# Altium PCB My_PCB.PcbDoc (part 1 of 2)
Units mil, origin at the board's own origin, x right, y up, seen from the top; angles counter-clockwise.
Board outline 5800 x 4400 mil, 2 copper layers (Top Layer, Bottom Layer); 133 components, 156 nets, 707 pads, 234 vias.
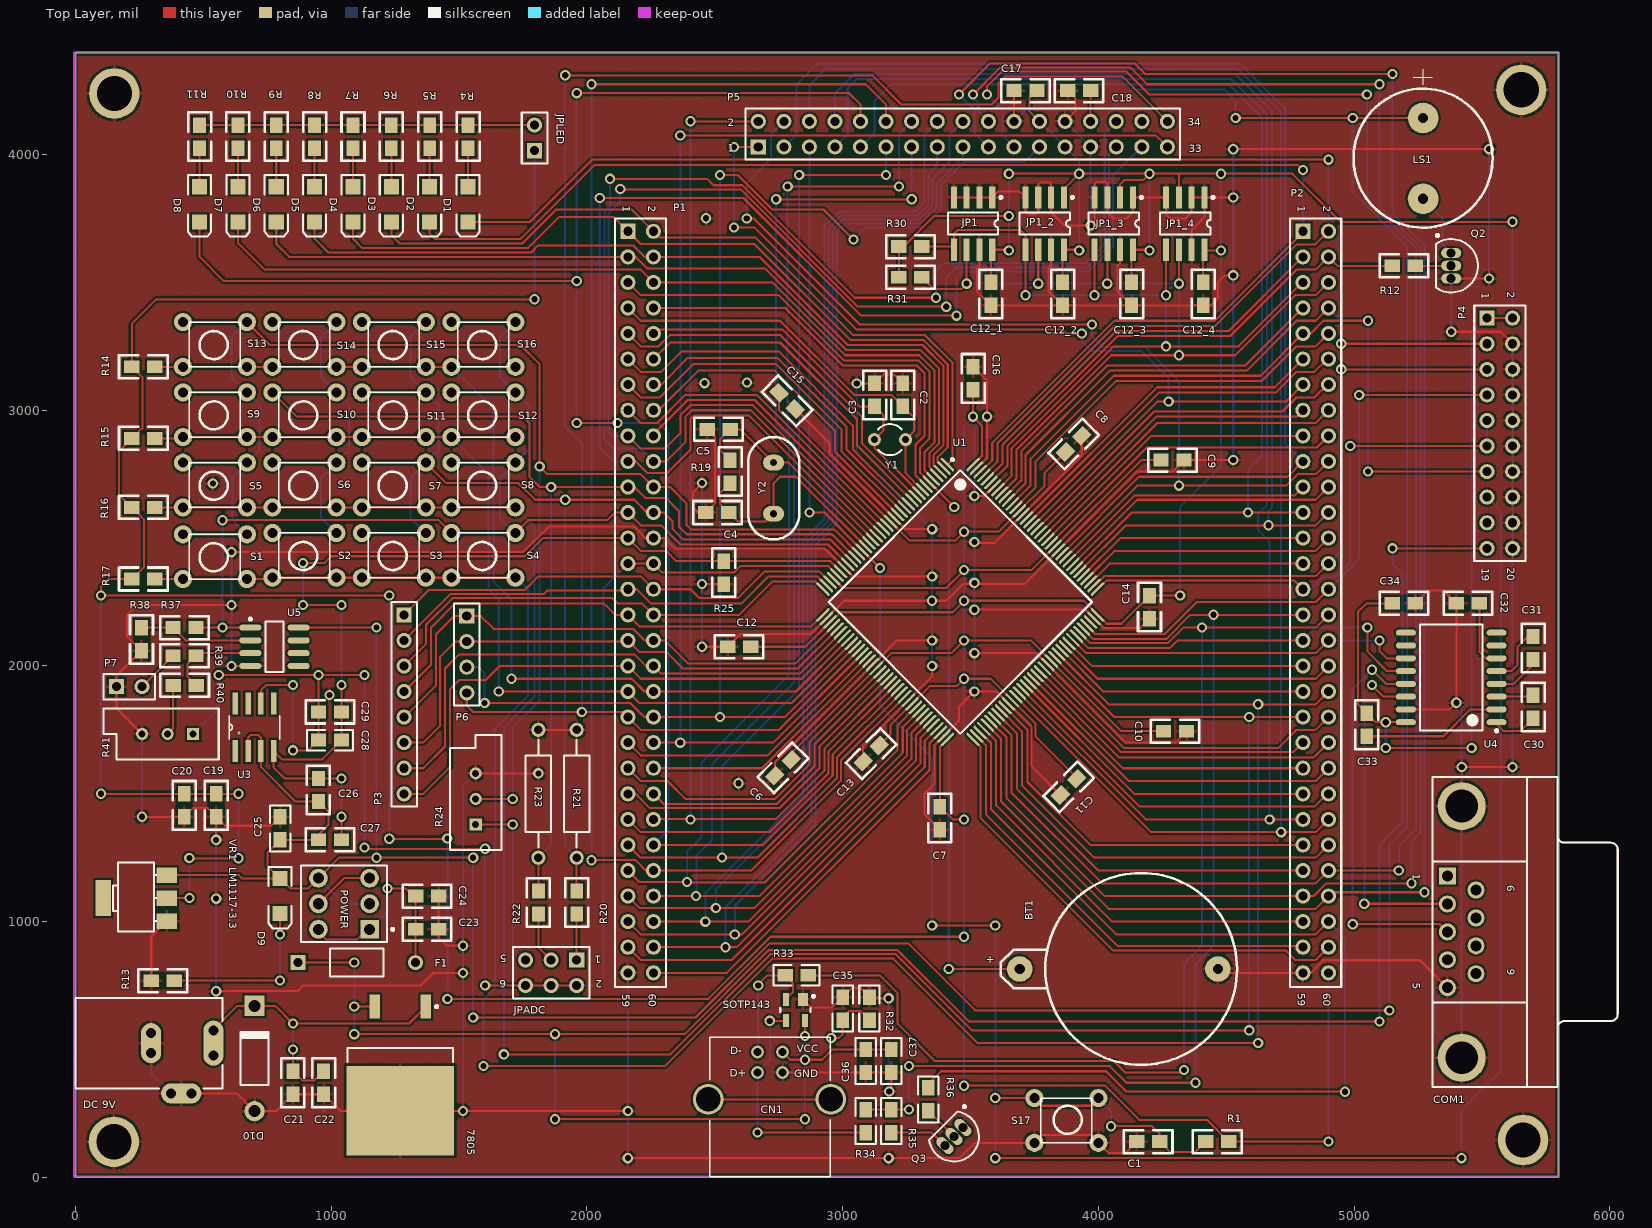
[diagram p0: Top Layer view]
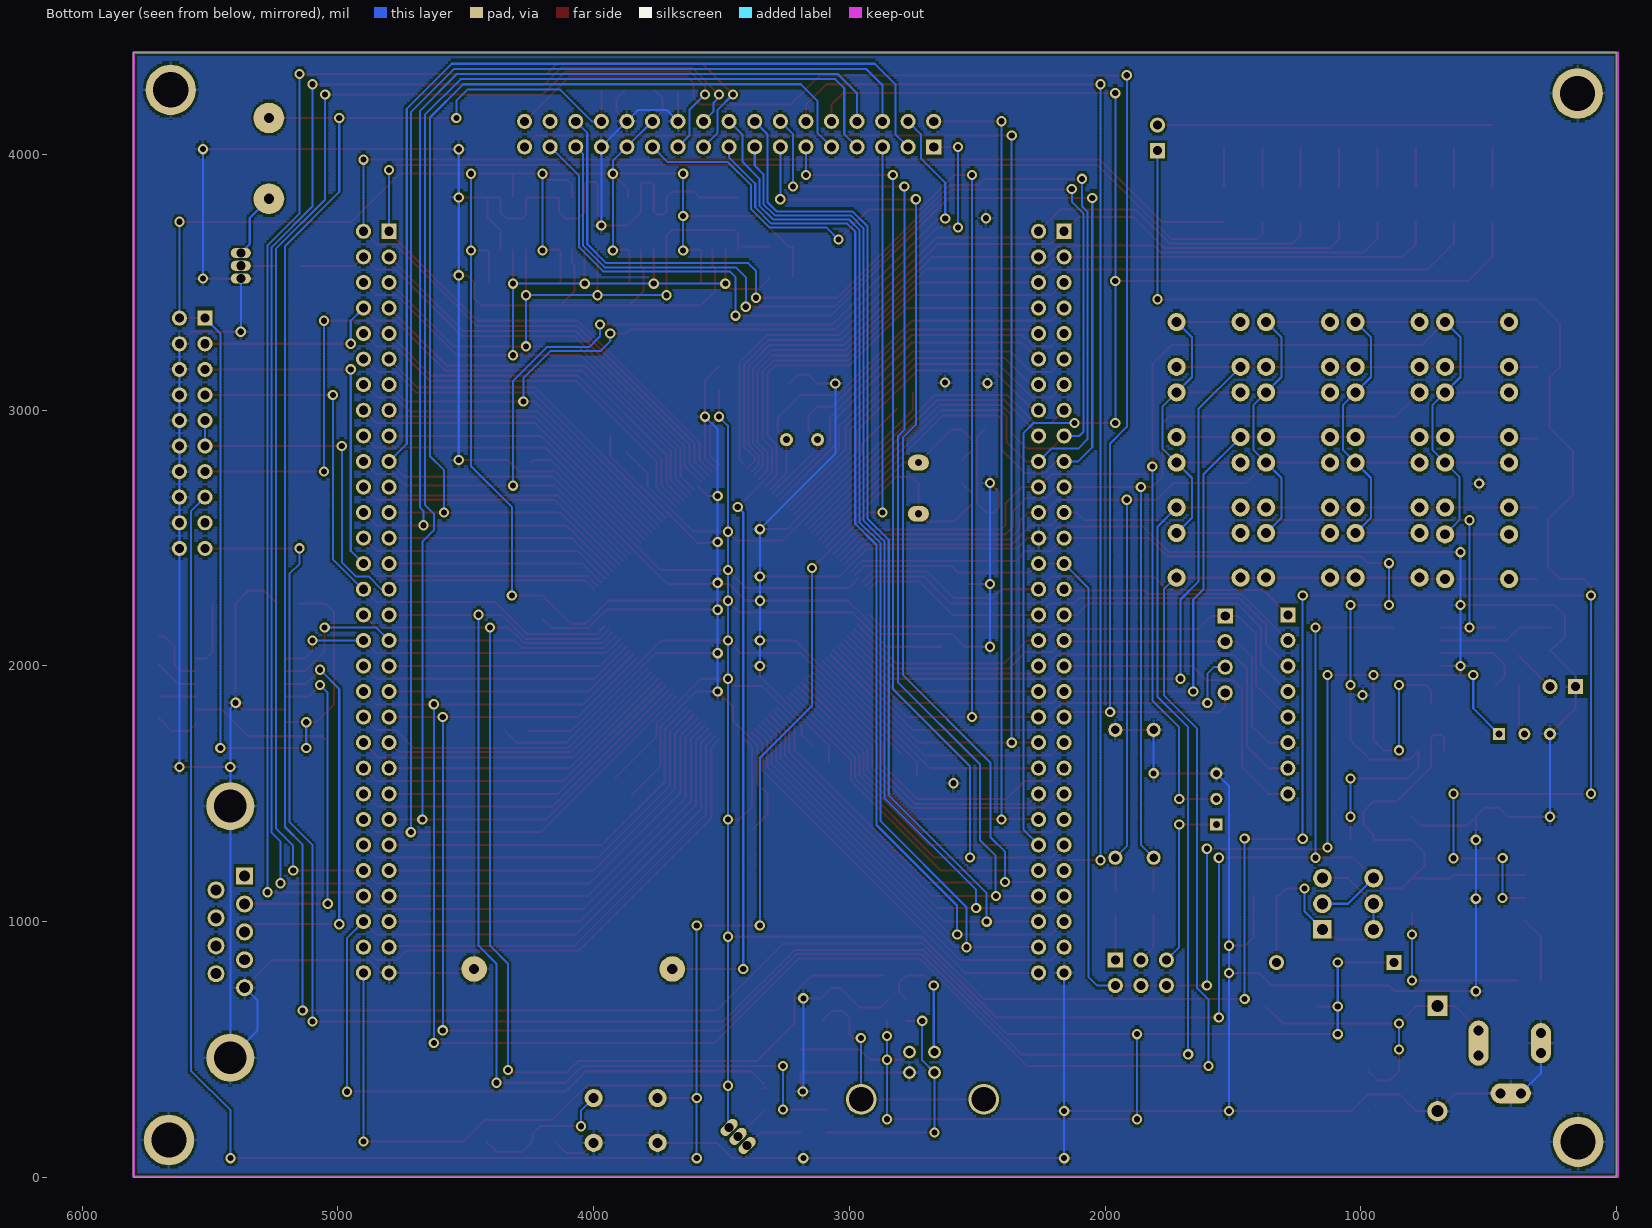
[diagram p1: Bottom Layer view, seen from below]

## Layer stack, top to bottom
Top Layer: signal copper 1.4
Dielectric: dielectric 12.6, FR-4, Dk 4.8
Bottom Layer: signal copper 1.4

## Board outline
0,4400 0,0 5800,0 5800,4400

## Design rules (kind name [scope] priority, off if disabled: settings)
AssemblyTestPointUsage [All] p1 off:
AssemblyTestpoint [All] p1 off: testpointundercomponent=TRUE minsize=40 maxsize=100 preferedsize=60 minholesize=0 maxholesize=40 preferedholesize=32 testpointgrid=1 usegrid=TRUE gridtolerance=0.01 allowsidetop=TRUE allowsidebottom=TRUE
Clearance [All] p1: gap=8
DiffPairsRouting [All] p1 off: maxlimit=10 minlimit=10 mostfreqgap=10 maxuncoupledlength=500
FabricationTestPointUsage [All] p1 off: valid=0 allowmultiple=FALSE
FabricationTestpoint [All] p1 off: side=3 testpointundercomponent=TRUE minsize=40 maxsize=100 preferedsize=60 minholesize=0 maxholesize=40 preferedholesize=32 testpointgrid=1 allowsidetop=TRUE allowsidebottom=TRUE usegrid=TRUE gridtolerance=0.01
FanoutControl Fanout_BGA [IsBGA] p1 off: bgadir=Out bgaviamode=Centered fanoutstyle=Auto fanoutdirection=Alternating viagrid=1 // Fanout_BGA (Default Rule)
FanoutControl Fanout_LCC [IsLCC] p2 off: bgadir=Out bgaviamode=Centered fanoutstyle=Auto fanoutdirection=Alternating viagrid=1 // Fanout_LCC (Default Rule)
FanoutControl Fanout_SOIC [IsSOIC] p3 off: bgadir=Out bgaviamode=Centered fanoutstyle=Auto fanoutdirection=Alternating viagrid=1 // Fanout_SOIC (Default Rule)
FanoutControl Fanout_Small [(CompPinCount < 5)] p4 off: bgadir=Out bgaviamode=Centered fanoutstyle=Auto fanoutdirection=OutThenIn viagrid=1 // Fanout_Small (Default Rule)
FanoutControl Fanout_Default [All] p5 off: bgadir=Out bgaviamode=Centered fanoutstyle=Auto fanoutdirection=Alternating viagrid=1 // Fanout_Default (Default Rule)
Height [All] p1 off: minheight=0 maxheight=1000 prefheight=500
HoleSize [All] p1: absolutevalues=TRUE maxlimit=500 minlimit=1 maxpercent=80.000 minpercent=20.000
MinimumSolderMaskSliver [All] p1 off: minsoldermaskwidth=10
NetAntennae [All] p1 off: netantennaetolerance=0
PolygonConnect [All] p1: connectstyle=Relief reliefconductorwidth=10 reliefentries=4 polygonreliefangle="90 Angle" airgapwidth=10
RoutingCorners [All] p1 off: cornerstyle=45-Degree minsetback=100 maxsetback=100
RoutingLayers [All] p1 off: top layer_v5=TRUE bottom layer_v5=TRUE
RoutingPriority [All] p1 off: routingpriority=0
RoutingVias [All] p1: holewidth=23.62 width=39.37 viastyle="Through Hole" minholewidth=14 minwidth=28 maxholewidth=280 maxwidth=500
SilkToSolderMaskClearance [IsPad] p1 off: minsilkscreentomaskgap=8 clearancetoexposedcopper=TRUE
SolderMaskExpansion [All] p1: expansion=4
Width [All] p1: maxlimit=100 minlimit=8 preferedwidth=8
10 further rules are at their usual default settings.

## Components (designator, comment, footprint, x,y, rotation, side; value= is the part's Value field where it differs from the comment)
7805 "Volt Reg" D2PAK_N 1270,400 r270 top
BT1 "3V" BATTERY 4080,815 r0 top
C1 "Cap Semi" 0805 4150,140 r0 top
C2 "Cap Semi" 0805 3235,3105 r270 top
C3 "Cap Semi" 0805 3125,3105 r270 top
C4 "Cap Semi" 0805 2465,2600 r0 top
C5 "Cap Semi" 0805 2470,2925 r0 top
C6 "Cap Semi" 0805 2735,1570 r45 top
C7 "Cap Semi" 0805 3380,1360 r90 top
C8 "Cap Semi" 0805 3935,2900 r225 top
C9 "Cap Semi" 0805 4335,2805 r180 top
C10 "Cap Semi" 0805 4345,1745 r180 top
C11 "Cap Semi" 0805 3852,1495 r45 top
C12 "Cap Semi" 0805 2550,2075 r0 top
C12_1 "104" 0805 3580,3500 r270 top
C12_2 "104" 0805 3860,3500 r270 top
C12_3 "104" 0805 4130,3500 r270 top
C12_4 "104" 0805 4410,3500 r270 top
C13 "Cap Semi" 0805 3080,1625 r45 top
C14 "Cap Semi" 0805 4200,2185 r90 top
C15 "Cap Semi" 0805 2815,3005 r135 top
C16 "Cap Semi" 0805 3510,3170 r270 top
C17 "Cap Semi" 0805 3760,4250 r180 top
C18 "Cap Semi" 0805 3880,4250 r0 top
C19 "Cap Pol3" 0805 550,1500 r270 top
C20 "Cap Semi" 0805 425,1410 r90 top
C21 "Cap Semi" 0805 850,325 r90 top
C22 "Cap Pol3" 0805 970,415 r270 top
C23 "Cap Semi" 0805 1420,970 r180 top
C24 "Cap Pol3" 0805 1330,1100 r0 top
C25 "Cap Semi" 0805 800,1410 r270 top
C26 "Cap Semi" 0805 950,1560 r270 top
C27 "Cap Semi" 0805 1040,1320 r180 top
C28 "Cap Semi" 0805 1040,1710 r180 top
C29 "Cap Pol3" 0805 950,1820 r0 top
C30 "Cap Pol3" 0805 5700,1795 r90 top
C31 "Cap Pol3" 0805 5700,2025 r90 top
C32 "Cap Pol3" 0805 5400,2245 r0 top
C33 "Cap Pol3" 0805 5050,1725 r90 top
C34 "Cap Pol3" 0805 5150,2245 r0 top
C35 "Cap" 0805 3000,705 r270 top
C36 "Cap" 0805 3090,410 r90 top
C37 "Cap Pol1" 0805 3190,500 r270 top
CN1 "USB-typeB" USB-B 2765,490 r0 top
COM1 "D Connector 9" DSUB1.385-2H9 5795,960 r270 top
D1 "LED2" 3.2X1.6X1.1 1535,3805 r270 top
D2 "LED2" 3.2X1.6X1.1 1385,3805 r270 top
D3 "LED2" 3.2X1.6X1.1 1235,3805 r270 top
D4 "LED2" 3.2X1.6X1.1 1085,3805 r270 top
D5 "LED2" 3.2X1.6X1.1 935,3805 r270 top
D6 "LED2" 3.2X1.6X1.1 785,3805 r270 top
D7 "LED2" 3.2X1.6X1.1 635,3805 r270 top
D8 "LED2" 3.2X1.6X1.1 485,3805 r270 top
D9 "PLED" 3.2X1.6X1.1 800,1100 r270 top
D10 "4007" DO-41 700,465 r90 top
"DC 9V" "PWR2.5" KLD-0202 0,525 r0 top
F1 "500MA" PIN-W2/E2.8 1100,840 r0 top
JP1 "ST24C02" SO8 3510,3730 r180 top
JP1_2 "ST24C02" SO8 3790,3730 r180 top
JP1_3 "ST24C02" SO8 4060,3730 r180 top
JP1_4 "ST24C02" SO8 4340,3730 r180 top
JPADC "ADC接口" HDR2X3 1960,850 r180 top
JPLED "Header 2" HDR1X2 1795,4015 r90 top
LS1 "Bell" BELL 5270,3985 r90 top
P1 "CON30X2" HDR2X30 2160,3700 r270 top
P2 "CON30X2" HDR2X30 4800,3700 r270 top
P3 "ADC_IN" HDR1X8 1285,2200 r270 top
P4 "JTAG" HDR2X10 5520,3360 r270 top
P5 "LCD" HDR2X17 2670,4030 r0 top
P6 "DAC_PWM" HDR1X4 1530,2195 r270 top
P7 "Header 2" HDR1X2 160,1919 r0 top
POWER "SW DPDT" DPDT-6 1050,1070 r180 top
Q2 "8050" TO-226-AA 5380,3565 r180 top
Q3 "8550" TO-92A 3435,160 r135 top
R1 "Res3" 0805 4420,140 r0 top
R4 "Res3" 0805 1535,4115 r270 top
R5 "Res3" 0805 1385,4115 r270 top
R6 "Res3" 0805 1235,4115 r270 top
R7 "Res3" 0805 1085,4115 r270 top
R8 "Res3" 0805 935,4115 r270 top
R9 "Res3" 0805 785,4115 r270 top
R10 "Res3" 0805 635,4115 r270 top
R11 "Res3" 0805 485,4115 r270 top
R12 "Res3" 0805 5150,3565 r0 top
R13 "Res3" 0805 296,769 r0 top
R14 "Res3" 0805 220,3170 r0 top
R15 "Res3" 0805 220,2890 r0 top
R16 "Res3" 0805 220,2620 r0 top
R17 "Res3" 0805 220,2340 r0 top
R19 "Res3" 0805 2560,2715 r90 top
R20 "Res3" 0805 1960,1120 r270 top
R21 "热敏电阻" AXIAL-0.5 1960,1500 r270 top
R22 "Res3" 0805 1810,1120 r270 top
R23 "光敏电阻" AXIAL-0.5 1810,1500 r270 top
R24 "滑动变阻器" VR5 1565,1480 r90 top
R25 "Res3" 0805 2535,2320 r90 top
R30 "10K" 0805 3220,3640 r0 top
R31 "10K" 0805 3220,3520 r0 top
R32 "Res3" 0805 3105,705 r270 top
R33 "Res3" 0805 2775,790 r0 top
R34 "Res3" 0805 3090,175 r90 top
R35 "Res3" 0805 3190,175 r90 top
R36 "Res3" 0805 3335,260 r90 top
R37 "Res2" 0805 381,2150 r0 top
R38 "Res2" 0805 258,2059 r90 top
R39 "Res2" 0805 381,2040 r0 top
R40 "Res2" 0805 382,1924 r0 top
R41 "Res Tap" VR5 360,1734 r180 top
S1 "0" KEYSB1 670,2340 r90 top
S2 "ENTER" KEYSB1 1020,2345 r90 top
S3 "." KEYSB1 1370,2345 r90 top
S4 "+" KEYSB1 1720,2345 r90 top
S5 "1" KEYSB1 670,2620 r90 top
S6 "2" KEYSB1 1020,2620 r90 top
S7 "3" KEYSB1 1370,2620 r90 top
S8 "-" KEYSB1 1720,2620 r90 top
S9 "4" KEYSB1 670,2895 r90 top
S10 "5" KEYSB1 1020,2895 r90 top
S11 "6" KEYSB1 1370,2895 r90 top
S12 "*" KEYSB1 1720,2895 r90 top
S13 "7" KEYSB1 670,3170 r90 top
S14 "8" KEYSB1 1020,3170 r90 top
S15 "9" KEYSB1 1370,3170 r90 top
S16 "/" KEYSB1 1720,3170 r90 top
S17 "RESET" KEYSB1 3750,310 r270 top
SOTP143 "PRTR5V0U2X" SOT-143_N 2815,655 r270 top
U1 "STM32F103ZET6" LQFP144_N 3460,2250 r315 top
U3 "REF196GSZ-REEL" R_8 700,1760 r90 top
U4 "MAX232AEWE" WSO16_L 5380,1955 r180 top
U5 "LM358AM" M08A_N 778,2075 r0 top
"VR1  LM1117-3.3" "Volt Reg" LM1117 356,1002 r90 top
Y1 "32.768K" R38 3185,2885 r270 top
Y2 "8MHz" XTAL 2730,2695 r90 top

## Footprints (in the part's own frame and the unit in brackets; to place one, negate y for a bottom-side part, rotate by r counter-clockwise, add the part's x,y. Pads: shape width x height; smd on the part's side, far side on the other; paste and mask are expansions set on the pad)
3.2X1.6X1.1 [mm] "SMT LED; 2 Flat Leads"
  rect 1.5x1.5 smd: 1(-1.75,0) 2(1.75,0)
  silkscreen extent -2.9,-1.15 3.2,1.15
0805 [mil]
  rect 60x50 smd: 1(0,0) 2(90,0)
  silkscreen extent -50,-45 140,45
AXIAL-0.5 [mm] "Axial Device, Thru-Hole; 2 Leads; 0.5 in Pin Spacing"
  round 1.4 hole 0.85: 1(-6.35,0) 2(6.35,0)
  silkscreen extent -5.33,-1.27 5.33,1.27
BATTERY [mil]
  round 100 hole 40: 1(-387.5,0) 2(387.5,0)
  silkscreen extent -462,-375 462,375
BELL [mil]
  round 120 hole 40: 1(158,0) 2(-158,0)
  silkscreen extent -271,-272 348,272
D2PAK_N [mm] "D2-PAK, 4-Leads, Body 8.8x10.4mm, Pitch 2.54mm, Lead Span 15.1mm, IPC Medium Density"
  rect 2.4x1.05 smd: 1(-6.8,2.54) 3(-6.8,-2.54)
  rect 8.9x10.65 smd: 2(3.55,0)
  silkscreen extent -6.92,-5.25 -1.3,5.25, body extent -2.7,-5.28 6.3,5.28, height 4.69
DO-41 [mm] "Diode, Axial; Body 5.2 x 2.7 mm (LxDia. max), Lead Dia. 0.86 mm (max)"
  round 2 hole 1.2: 1(-5.23,0)
  rect 2x2 hole 1.2: 2(5.23,0)
  silkscreen extent -2.65,-1.4 2.75,1.4
DPDT-6 [mm] "Switch; 6 Leads"
  rect 1.85x1.85 hole 1.1: 1(-2.54,2.54)
  round 1.85 hole 1.1: 2(-2.54,0) 3(-2.54,-2.54) 4(2.54,-2.54) 5(2.54,0) 6(2.54,2.54)
  silkscreen extent -4.96,-3.81 4.28,3.81
DSUB1.385-2H9 [mm] "Connector; D Subminiature; 9 Position; Right Angle; Pitch 1.385 mm"
  rect 1.69x1.69 hole 1.09: 1(-5.54,-10.92)
  round 1.69 hole 1.09: 2(-2.77,-10.92) 3(0,-10.92) 4(2.77,-10.92) 5(5.54,-10.92) 6(-4.155,-8.08) 7(-1.385,-8.08) 8(1.385,-8.08) 9(4.155,-8.08)
  round 4.76 hole 3.26: 10(-12.495,-9.5) 11(12.495,-9.5)
  silkscreen extent -15.4,-12.4 15.4,6
HDR1X2 [mm] "Connector; Header; 2 Position"
  rect 1.5x1.5 hole 0.9: 1(0,0)
  round 1.5 hole 0.9: 2(2.54,0)
  silkscreen extent -1.27,-1.27 3.81,1.27
HDR1X4 [mm] "Connector; Header; 4 Position"
  rect 1.5x1.5 hole 0.9: 1(0,0)
  round 1.5 hole 0.9: 2(2.54,0) 3(5.08,0) 4(7.62,0)
  silkscreen extent -1.27,-1.27 8.89,1.27
HDR1X8 [mm] "Connector; Header; 8 Position"
  rect 1.5x1.5 hole 0.9: 1(0,0)
  round 1.5 hole 0.9: 2(2.54,0) 3(5.08,0) 4(7.62,0) 5(10.16,0) 6(12.7,0) 7(15.24,0) 8(17.78,0)
  silkscreen extent -1.27,-1.27 19.05,1.27
HDR2X3 [mm] "Connector; Header; 3x2 Position"
  rect 1.5x1.5 hole 0.9: 1(0,0)
  round 1.5 hole 0.9: 2(0,2.54) 3(2.54,0) 4(2.54,2.54) 5(5.08,0) 6(5.08,2.54)
  silkscreen extent -1.27,-1.27 6.35,3.81
HDR2X10 [mm] "Connector; Header; 10x2 Position"
  rect 1.5x1.5 hole 0.9: 1(0,0)
  round 1.5 hole 0.9: 2(0,2.54) 3(2.54,0) 4(2.54,2.54) 5(5.08,0) 6(5.08,2.54) 7(7.62,0) 8(7.62,2.54) 9(10.16,0) 10(10.16,2.54) 11(12.7,0) 12(12.7,2.54) 13(15.24,0) 14(15.24,2.54) 15(17.78,0) 16(17.78,2.54) 17(20.32,0) 18(20.32,2.54) 19(22.86,0) 20(22.86,2.54)
  silkscreen extent -1.27,-1.27 24.13,3.81
HDR2X17 [mm] "Connector; Header; 17x2 Position"
  rect 1.5x1.5 hole 0.9: 1(0,0)
  round 1.5 hole 0.9: 2(0,2.54) 3(2.54,0) 4(2.54,2.54) 5(5.08,0) 6(5.08,2.54) 7(7.62,0) 8(7.62,2.54) 9(10.16,0) 10(10.16,2.54) 11(12.7,0) 12(12.7,2.54) 13(15.24,0) 14(15.24,2.54) 15(17.78,0) 16(17.78,2.54) 17(20.32,0) 18(20.32,2.54) 19(22.86,0) 20(22.86,2.54) 21(25.4,0) 22(25.4,2.54) 23(27.94,0) 24(27.94,2.54) 25(30.48,0) 26(30.48,2.54) 27(33.02,0) 28(33.02,2.54) 29(35.56,0) 30(35.56,2.54) 31(38.1,0) 32(38.1,2.54) 33(40.64,0) 34(40.64,2.54)
  silkscreen extent -1.27,-1.27 41.91,3.81
HDR2X30 [mm] "Connector; Header; 30x2 Position"
  rect 1.5x1.5 hole 0.9: 1(0,0)
  round 1.5 hole 0.9: 2(0,2.54) 3(2.54,0) 4(2.54,2.54) 5(5.08,0) 6(5.08,2.54) 7(7.62,0) 8(7.62,2.54) 9(10.16,0) 10(10.16,2.54) 11(12.7,0) 12(12.7,2.54) 13(15.24,0) 14(15.24,2.54) 15(17.78,0) 16(17.78,2.54) 17(20.32,0) 18(20.32,2.54) 19(22.86,0) 20(22.86,2.54) 21(25.4,0) 22(25.4,2.54) 23(27.94,0) 24(27.94,2.54) 25(30.48,0) 26(30.48,2.54) 27(33.02,0) 28(33.02,2.54) 29(35.56,0) 30(35.56,2.54) 31(38.1,0) 32(38.1,2.54) 33(40.64,0) 34(40.64,2.54) 35(43.18,0) 36(43.18,2.54) 37(45.72,0) 38(45.72,2.54) 39(48.26,0) 40(48.26,2.54) 41(50.8,0) 42(50.8,2.54) 43(53.34,0) 44(53.34,2.54) 45(55.88,0) 46(55.88,2.54) 47(58.42,0) 48(58.42,2.54) 49(60.96,0) 50(60.96,2.54) 51(63.5,0) 52(63.5,2.54) 53(66.04,0) 54(66.04,2.54) 55(68.58,0) 56(68.58,2.54) 57(71.12,0) 58(71.12,2.54) 59(73.66,0) 60(73.66,2.54)
  silkscreen extent -1.27,-1.27 75.06,3.81
KEYSB1 [mil]
  round 71 hole 39: 1(0,250) 1(0,0) 2(175,250) 2(175,0)
  silkscreen extent 0,25 175,225
KLD-0202 [mm] "DC Power Jack, 2.5mm, KLD Series, PCB Mount"
  oval 2x4.5 all layers, no hole: 1(13.7,0)
  round 1.5 hole 1: 1A(13.7,-1.25) 1B(13.7,1.25) 2A(7.5,-1) 2B(7.5,1) 3A(9.5,-5) 3B(11.5,-5)
  oval 2x4 all layers, no hole: 2(7.5,0)
  oval 4x2 all layers, no hole: 3(10.5,-5)
  silkscreen extent 0,-4.5 14.6,4.5
LM1117 [mil]
  rect 140x60 smd: 0(90,248)
  rect 60x80 smd: 1(0,0) 2(90,0) 3(180,0)
  silkscreen extent -40,40 230,210
LQFP144_N [mm] "Thin QFP, 144-Leads, Body 20x20mm, Pitch 0.5mm, IPC Medium Density"
  oval 1.8x0.254 smd: 1(-10.55,8.75) 2(-10.55,8.25) 3(-10.55,7.75) 4(-10.55,7.25) 5(-10.55,6.75) 6(-10.55,6.25) 7(-10.55,5.75) 8(-10.55,5.25) 9(-10.55,4.75) 10(-10.55,4.25) 11(-10.55,3.75) 12(-10.55,3.25) 13(-10.55,2.75) 14(-10.55,2.25) 15(-10.55,1.75) 16(-10.55,1.25) 17(-10.55,0.75) 18(-10.55,0.25) 19(-10.55,-0.25) 20(-10.55,-0.75) 21(-10.55,-1.25) 22(-10.55,-1.75) 23(-10.55,-2.25) 24(-10.55,-2.75) 25(-10.55,-3.25) 26(-10.55,-3.75) 27(-10.55,-4.25) 28(-10.55,-4.75) 29(-10.55,-5.25) 30(-10.55,-5.75) 31(-10.55,-6.25) 32(-10.55,-6.75) 33(-10.55,-7.25) 34(-10.55,-7.75) 35(-10.55,-8.25) 36(-10.55,-8.75) 73(10.55,-8.75) 74(10.55,-8.25) 75(10.55,-7.75) 76(10.55,-7.25) 77(10.55,-6.75) 78(10.55,-6.25) 79(10.55,-5.75) 80(10.55,-5.25) 81(10.55,-4.75) 82(10.55,-4.25) 83(10.55,-3.75) 84(10.55,-3.25) 85(10.55,-2.75) 86(10.55,-2.25) 87(10.55,-1.75) 88(10.55,-1.25) 89(10.55,-0.75) 90(10.55,-0.25) 91(10.55,0.25) 92(10.55,0.75) 93(10.55,1.25) 94(10.55,1.75) 95(10.55,2.25) 96(10.55,2.75) 97(10.55,3.25) 98(10.55,3.75) 99(10.55,4.25) 100(10.55,4.75) 101(10.55,5.25) 102(10.55,5.75) 103(10.55,6.25) 104(10.55,6.75) 105(10.55,7.25) 106(10.55,7.75) 107(10.55,8.25) 108(10.55,8.75)
  oval 0.254x1.8 smd: 37(-8.75,-10.55) 38(-8.25,-10.55) 39(-7.75,-10.55) 40(-7.25,-10.55) 41(-6.75,-10.55) 42(-6.25,-10.55) 43(-5.75,-10.55) 44(-5.25,-10.55) 45(-4.75,-10.55) 46(-4.25,-10.55) 47(-3.75,-10.55) 48(-3.25,-10.55) 49(-2.75,-10.55) 50(-2.25,-10.55) 51(-1.75,-10.55) 52(-1.25,-10.55) 53(-0.75,-10.55) 54(-0.25,-10.55) 55(0.25,-10.55) 56(0.75,-10.55) 57(1.25,-10.55) 58(1.75,-10.55) 59(2.25,-10.55) 60(2.75,-10.55) 61(3.25,-10.55) 62(3.75,-10.55) 63(4.25,-10.55) 64(4.75,-10.55) 65(5.25,-10.55) 66(5.75,-10.55) 67(6.25,-10.55) 68(6.75,-10.55) 69(7.25,-10.55) 70(7.75,-10.55) 71(8.25,-10.55) 72(8.75,-10.55) 109(8.75,10.55) 110(8.25,10.55) 111(7.75,10.55) 112(7.25,10.55) 113(6.75,10.55) 114(6.25,10.55) 115(5.75,10.55) 116(5.25,10.55) 117(4.75,10.55) 118(4.25,10.55) 119(3.75,10.55) 120(3.25,10.55) 121(2.75,10.55) 122(2.25,10.55) 123(1.75,10.55) 124(1.25,10.55) 125(0.75,10.55) 126(0.25,10.55) 127(-0.25,10.55) 128(-0.75,10.55) 129(-1.25,10.55) 130(-1.75,10.55) 131(-2.25,10.55) 132(-2.75,10.55) 133(-3.25,10.55) 134(-3.75,10.55) 135(-4.25,10.55) 136(-4.75,10.55) 137(-5.25,10.55) 138(-5.75,10.55) 139(-6.25,10.55) 140(-6.75,10.55) 141(-7.25,10.55) 142(-7.75,10.55) 143(-8.25,10.55) 144(-8.75,10.55)
  silkscreen extent -10.67,-9.25 9.25,9.57, body extent -10,-10 10,10, height 1.6
M08A_N [mm] "SOIC, 8-Leads, Body 4.9x3.9mm, Pitch 1.27mm, IPC Medium Density"
  oval 2.2x0.6 smd: 1(-2.4,1.905) 2(-2.4,0.635) 3(-2.4,-0.635) 4(-2.4,-1.905) 5(2.4,-1.905) 6(2.4,-0.635) 7(2.4,0.635) 8(2.4,1.905)
  silkscreen extent -2.52,-2.5 0.9,2.88, body extent -2,-2.5 2,2.5, height 1.75
PIN-W2/E2.8 [mm] "Thru-Hole; 2 Leads"
  rect 1.5x1.5 hole 0.9: 1(-5.825,0)
  round 1.5 hole 0.9: 2(5.825,0)
  silkscreen extent -2.65,-1.4 2.65,1.4
R38 [mm] "Crystal, Thru-Hole; 2 Leads; Body 3.1 x 8.2 mm (Dia.xH)"
  round 1.3 hole 0.7: 1(0,1.55) 2(0,-1.55)
  silkscreen extent -1.55,-1.19 1.55,1.17
R_8 [mil]
  rect 86x22 smd: 1(-93,75) 2(-93,25) 3(-93,-25) 4(-93,-75) 5(93,-75) 6(93,-25) 7(93,25) 8(93,75)
  silkscreen extent -46,-98 46,98
SO8 [mm]
  rect 0.6x2.2 smd: 1(-1.905,-2.6) 2(-0.635,-2.6) 3(0.635,-2.6) 4(1.905,-2.6) 5(1.905,2.6) 6(0.635,2.6) 7(-0.635,2.6) 8(-1.905,2.6)
  silkscreen extent -2.88,-2.72 2.5,1.1
SOT-143_N [mm] "SOT143, 4-Leads, Body 2.9x1.3mm, Pitch 1.9mm, Lead Span 2.5mm, IPC Medium Density"
  rect 1.3x1 smd: 1(-1.05,0.75)
  rect 1.3x0.6 smd: 2(-1.05,-0.95) 3(1.05,-0.95) 4(1.05,0.95)
  silkscreen extent -1.47,-1.5 0.2,1.93, body extent -0.7,-1.52 0.7,1.52, height 1.1
TO-92A [mm] "TO, Flat Index; 3 In-Line, Axial Leads; Body Dia. 4.5mm; Leads 0.51 x 0.48 mm (max)"
  oval 2x1 hole 0.9: 1(0,-1.27) 2(0,0) 3(0,1.27)
  silkscreen extent -2.48,-2.95 1.5,2.48, body extent -2.5,-2.5 1.5,2.5, height 6.86
TO-226-AA [mm] "TO, Flat Index; 3 In-Line, Axial Leads; Body Dia. 4.8mm; Leads 0.55 x 0.51 mm (max)"
  oval 2x1 hole 0.9: 1(0,-1.27) 2(0,0) 3(0,1.27)
  silkscreen extent -2.65,-3.13 1.52,2.65, body extent -2.66,-2.66 1.52,2.66, height 5.33
USB-B [mil]
  round 50 hole 30: 1(0,0) 2(-98,0) 3(-98,-80) 4(0,-80)
  round 120 hole 95: 5(-291,-185) 6(189,-185)
  silkscreen extent -285,-488 187,57
VR5 [mm] "Thru-Hole; 3 Leads"
  rect 1.2x1.2 hole 0.7: 1(-2.54,0)
  round 1.2 hole 0.7: 2(0,0) 3(2.54,0)
  silkscreen extent -5.08,-2.54 6.35,2.54
WSO16_L [mm] "SOIC, 16-Leads, Body 10.3x7.5mm, Pitch 1.27mm, IPC High Density"
  oval 2x0.6 smd: 1(-4.5,4.445) 2(-4.5,3.175) 3(-4.5,1.905) 4(-4.5,0.635) 5(-4.5,-0.635) 6(-4.5,-1.905) 7(-4.5,-3.175) 8(-4.5,-4.445) 9(4.5,-4.445) 10(4.5,-3.175) 11(4.5,-1.905) 12(4.5,-0.635) 13(4.5,0.635) 14(4.5,1.905) 15(4.5,3.175) 16(4.5,4.445)
  silkscreen extent -4.62,-5.25 3.1,5.42, body extent -3.75,-5.25 3.75,5.25, height 2.65
XTAL [mil]
  oval 62x82 hole 28: 1(-100,0) 2(100,0)
  silkscreen extent -200,-100 200,100

## Part data
7805 "VR1  LM1117-3.3": "Voltage Regulator"
BT1: library part Battery, "Multicell Battery"
C1 C2 C3 C4 C5 C6 C7 C8 C9 C10 C11 C12 C13 C14 C15 C16 C17 C18 C20 C21 C23 C25 C26 C27 C28: "Capacitor (Semiconductor SIM Model)"
C12_1 C12_2 C12_3 C12_4: library part CAP, "Capacitor"
C19 C22 C24 C29 C30 C31 C32 C33 C34: "Polarized Capacitor (Surface Mount)"
C35 C36: "Capacitor"
C37: "Polarized Capacitor (Radial)"
CN1: library part USB-B, "USB-B"
COM1: "Receptacle Assembly, 9 Position, Right Angle"
D1 D2 D3 D4 D5 D6 D7 D8: "Typical RED, GREEN, YELLOW, AMBER GaAs LED"
D9: library part LED2, "Typical RED, GREEN, YELLOW, AMBER GaAs LED"
D10: library part Diode, "Default Diode"
"DC 9V": "Low Voltage Power Supply Connector"
F1: library part "Fuse 2", "Fuse"
JP1 JP1_2 JP1_3 JP1_4: library part 24C02
JPADC: library part "Header 3X2", "Header, 3-Pin, Dual row"
JPLED P7: "Header, 2-Pin"
LS1: "Electrical Bell"
P1 P2: library part "Header 30X2", "Header, 30-Pin, Dual row"
P3: library part "Header 8", "Header, 8-Pin"
P4: library part "Header 10X2", "Header, 10-Pin, Dual row"
P5: library part "Header 17X2", "Header, 17-Pin, Dual row"
P6: library part "Header 4", "Header, 4-Pin"
POWER: "Switch"
Q2: library part NPN, "NPN Bipolar Transistor"
Q3: library part 2N3906, "PNP General Purpose Amplifier"
R1 R4 R5 R6 R7 R8 R9 R10 R11 R12 R13 R14 R15 R16 R17 R19 R20 R22 R25 R32 R33 R34 R35 R36 R37 R38 R39 R40: "Resistor"
R21 R23: library part "Res Semi", "Semiconductor Resistor"
R24: library part "Res Tap", "Tapped Resistor"
R30 R31: library part Res2
R41: "Tapped Resistor"
S1 S2 S3 S4 S5 S6 S7 S8 S9 S10 S11 S12 S13 S14 S15 S16 S17: library part SW-PB, "Switch"
SOTP143: library part "Header 2X2", "Header, 2-Pin, Dual row"
U1: "STM32 ARM-based 32-bit MCU Performance Line with 512 kB Flash, 64 kB Internal RAM, -40 to +85癈 Temperature, 144-Pin LQFP, Tray"
U3: "Imported"
U4: "+5V Powered, Multi-Channel RS-232 Driver/Receiver"
U5: "Low Power Dual Operational Amplifier"
Y1 Y2: library part XTAL, "Crystal Oscillator"

## Free pads (board coordinates)
  round 196.85 hole 137.8: 0(5654,4253) 1(5661,146) 2(150,139) 3(152,4239)

## Via types
v1: diameter 40, hole 24, Top Layer to Bottom Layer, 233 vias
v2: diameter 40, hole 24, Top Layer to Bottom Layer, tented bottom, 1 vias

## Nets (pads, with @x,y where several pads share a name; then routed paths per layer and width w, separated by ;. In a path a pad name is that pad's centre, name@x,y a point inside that pad or via, vN(x,y) a via of type N, cw(c..) or ccw(c..) an arc to the next point about the centre after c; other vN are vias at no path point)
F5V: 7805.3 C36.2 C37.1 CN1.1 F1.1 P4.19 SOTP143.4 | length 9268.1
  Top Layer w8: F1.1@870.67,840 v1(1090,840) v1@1092,838 ; v1(1090,560) v1(1875,560) 2382.25,560 2711.25,889 3213.63,889 3492.63,610 v1(5100,610) ; v1@1090,667.72 7805.3@1170,667.72 ; v1(1875,227.4) v1(2852.4,227.4) ; CN1.1@2765,490 2795,460 v1(2852.4,460) 2920,460 2960,500 C36.2@3090,500 C37.1@3190,500 ; v1(2852.4,552.4) SOTP143.4@2852.4,613.66 ; v1(5150,2460) P4.19@5520,2460
  Bottom Layer w8: v1(1090,560) v1(1090,668) v1(1090,840) ; v1(1875,227.4) v1(1875,560) ; v1(2852.4,227.4) v1(2852.4,460) v1(2852.4,552.4) ; v1(5100,610) 5100,1300 5190,1390 5190,2360 5150,2400 v1(5150,2460)
FSMC_A10: P1.48 P5.2 U1.56 | length 4193.5
  Top Layer w8: P1.48@2260,1401 2738,1401 2929.31,1592.31 2929.31,1677.56 U1.56@3187.18,1935.42 ; v1(2405,4130) P5.2@2670,4130
  Bottom Layer w8: v1(2405,1400) v1(2405,4130)
FSMC_D0: P2.48 P5.6 U1.85 | length 6360.3
  Top Layer w8: U1.85@3677.14,1879.74 4206.89,1350 4850,1350 P2.48@4900,1400
  Bottom Layer w8: P5.6@2870,4130 2870,4270 2935,4335 4545,4335 4715,4165 v1(4715,1350)
FSMC_D1: P2.47 P5.7 U1.86 | length 6065
  Top Layer w8: U1.86@3691.06,1893.66 4185,1399.72 4799.72,1399.72 P2.47@4800,1400
  Bottom Layer w8: P5.7@2970,4030 3020,4080 3020,4260 3055,4295 4520,4295 4660,4155 4660,2630 4625,2595 4625,2530 4670,2485 v1(4670,1400)
FSMC_D2: P2.24 P5.8 U1.114 | length 4605
  Top Layer w8: U1.114@3927.69,2369.71 4107.98,2550 4850,2550 P2.24@4900,2600
  Bottom Layer w8: P5.8@2970,4130 2970,4240 3045,4315 4535,4315 4680,4170 4680,2620 4665,2605 v1(4665,2550)
FSMC_D3: P2.23 P5.9 U1.115 | length 4342.2
  Top Layer w8: U1.115@3913.77,2383.63 4130.15,2600 P2.23@4800,2600
  Bottom Layer w8: P5.9@3070,4030 3125,4085 3125,4210 3190,4275 4510,4275 4640,4145 4640,2820 4585,2765 v1(4585,2600)
FSMC_D4: D8.2 P1.50 P5.10 U1.58 | length 7408.6
  Top Layer w8: D8.2@485,3736.1 485,3600 580,3505 v1(1960,3505) ; v1(1960,2950) v1(2120,2950) ; v1(1960,4240) 3025,4240 3070,4195 P5.10@3070,4130 ; P1.50@2260,1300 2689,1300 2961.31,1572.31 2961.31,1653.88 U1.58@3215.02,1907.58
  Bottom Layer w8: v1(1960,2950) v1(1960,3505) v1(1960,4240) v1@1970,4240 ; v1(2120,2950) 2280,2950 2318.31,2911.69 2318.31,1358.31 P1.50@2260,1300
FSMC_D5: P1.49 P5.11 U1.59 | length 4647.8
  Top Layer w8: P1.49@2160,1300 2209,1251 v1(2528,1251) ; v1@2528,1250 2667,1250 2977.31,1560.31 2977.31,1642.04 U1.59@3228.94,1893.66 ; v1(2830,3920) v1(3170,3920)
  Bottom Layer w8: v1(2528,1251) 2528,1608 2830,1910 v1(2830,3920) ; v1(3170,3920) P5.11@3170,4030
FSMC_D6: P1.52 P5.12 U1.60 | length 5855.6
  Top Layer w8: v1@2018,1241.53 2188.47,1241.53 2230,1200 P1.52@2260,1200 2643,1200 2993.31,1550.31 2993.31,1630.2 U1.60@3242.86,1879.74 ; v1(2018,4275) 3090,4275 3170,4195 P5.12@3170,4130
  Bottom Layer w8: v1(2018,1240) v1(2018,4275)
FSMC_D7: P1.51 P5.13 U1.63 | length 5074.7
  Top Layer w8: P1.51@2160,1200 2205,1155 v1(2391,1155) ; v1@2391,1153 2695,1153 3215,1673 3215,1768.37 U1.63@3284.62,1837.99 ; v1(2740,3825) v1(3270,3825)
  Bottom Layer w8: v1(2391,1155) 2391,1273 2448,1330 2448,1622 2791,1965 2791,2892 2740,2943 v1(2740,3825) ; v1(3270,3825) P5.13@3270,4030
FSMC_D8: P1.54 P5.14 U1.64 | length 5051.1
  Top Layer w8: P1.54@2260,1100 2674,1100 3235,1661 3235,1760.53 U1.64@3298.53,1824.07 ; v1(2785,3875) v1(3220,3875)
  Bottom Layer w8: v1@2428,1100 2428,1258 2489,1319 2489,1615 2810,1936 2810,2899 2785,2924 v1(2785,3875) ; v1(3220,3875) 3220,4080 P5.14@3270,4130
  other v1: 2427,1100
FSMC_D9: P1.53 P5.15 U1.65 | length 5053.6
  Top Layer w8: P1.53@2160,1100 2207,1053 2655,1053 3251,1649 3251,1748.69 U1.65@3312.45,1810.15
  Bottom Layer w8: v1(2504,1053) 2504,1124 2862,1482 2862,2486.37 2945,2569.37 2945,3712.37 2994.63,3762 3291.63,3762 3336,3806.37 3336,3923 3370,3957 P5.15@3370,4030
FSMC_D10: P1.56 P5.16 U1.66 | length 5134.5
  Top Layer w8: P1.56@2260,1000 2631,1000 3270,1639 3270,1739.85 U1.66@3326.37,1796.23
  Bottom Layer w8: v1@2464,1000 2464,1113 2846,1495 2846,2493 2929,2576 2929,3719 2988,3778 3285,3778 3320,3813 3320,4080 P5.16@3370,4130
  other v1: 2463,1000
FSMC_D11: P1.55 P5.17 U1.67 | length 5226.8
  Top Layer w8: P1.55@2160,1000 2210,950 2607,950 3286,1629 3286,1728.01 U1.67@3340.29,1782.31
  Bottom Layer w8: v1@2579,950 2579,1063 2894,1378 2894,2473.12 2977,2556.12 2977,3699.12 3007.88,3730 3304.88,3730 3368,3793.12 3368,3886 3470,3988 P5.17@3470,4030
  other v1: 2578,950
FSMC_D12: P1.58 P5.18 U1.68 | length 5301
  Top Layer w8: P1.58@2260,900 2586,900 3305,1619 3305,1719.18 U1.68@3354.21,1768.39
  Bottom Layer w8: v1(2542,900) 2542,1057 2878,1393 2878,2479.75 2961,2562.75 2961,3705.75 3001.25,3746 3298.25,3746 3352,3799.75 3352,3906 3418,3972 3418,4078 P5.18@3470,4130
FSMC_D13: P2.54 P5.19 U1.77 | length 7443.3
  Top Layer w8: v1(3455,4235) 3576,4356 4142,4356 4183,4315 v1(5150,4315) ; U1.77@3565.79,1768.39 3620,1714.18 3620,1470 4040,1050 4850,1050 P2.54@4900,1100 4915,1115 v1(5275,1115)
  Bottom Layer w8: v1(3455,4235) 3515,4175 3515,4085 P5.19@3570,4030 ; v1(5150,4315) 5150,3771 5275,3646 v1(5275,1115)
FSMC_D14: P2.53 P5.20 U1.78 | length 7091.2
  Top Layer w8: v1(3510,4235) 3615,4340 4126,4340 4191,4275 v1(5100,4275) ; U1.78@3579.71,1782.31 3640,1722.02 3640,1485 4025,1100 P2.53@4776,1100 ; P2.53@4774,1102 P2.53@4776,1100 ; P2.53@4780,1096 P2.53@4776,1100 ; v1(5225,1150) 4891.27,1150 4841.27,1100 P2.53@4800,1100 P2.53@4776,1100
  Bottom Layer w8: v1(3510,4235) 3510,4223.63 3531,4202.63 3531,4169 P5.20@3570,4130 ; v1(5100,4275) 5100,3797 5259,3638 5259,1348 5225,1314 v1(5225,1150)
FSMC_D15: P2.52 P5.21 U1.79 | length 6970.8
  Top Layer w8: v1(3565,4235) 3565,4267.37 3621.63,4324 4110,4324 4199,4235 v1(5050,4235) ; U1.79@3593.63,1796.23 3660,1729.85 3660,1505 4015,1150 4850,1150 P2.52@4900,1200 v1(5175,1200)
  Bottom Layer w8: v1(3565,4235) 3625,4175 3625,4075 P5.21@3670,4030 ; v1(5050,4235) 5050,3824.37 5243,3631.37 5243,1365 5175,1297 v1(5175,1200)
FSMC_NE4: P2.13 P5.1 U1.127 | length 3743.8
  Top Layer w8: v1(2575,3715) 2655,3715 3055,3315 3860,3315 3875,3300 v1(3935,3300) ; v1(2575,4030) P5.1@2670,4030 ; U1.127@3746.74,2550.66 4230,3033.92 4733.92,3033.92 P2.13@4800,3100
  Bottom Layer w8: v1(2575,3715) v1(2575,4030) ; v1(3935,3300) 3935,3270 3974,3231 4169,3231 4275,3125 v1(4275,3034)
FSMC_NOE: P2.20 P5.4 U1.118 | length 4013.2
  Top Layer w8: v1(2625,3750) 2653,3750 3068,3335 v1(3975,3335) ; U1.118@3872.02,2425.38 4151.63,2705 4735,2705 4780,2750 4850,2750 P2.20@4900,2800
  Bottom Layer w8: v1(2625,3750) 2625,3890 2720,3985 2720,4080 P5.4@2770,4130 ; v1(3975,3335) 3975,3289 4017,3247 4183,3247 4315,3115 v1(4315,2705)
FSMC_NWE: P2.19 P5.3 U1.119 | length 4781.6
  Top Layer w8: U1.119@3858.1,2439.3 4158.79,2740 4740,2740 P2.19@4800,2800
  Bottom Layer w8: P5.3@2770,4030 2820,4080 2820,4275 2900,4355 4555,4355 4731,4179 4731,2869 P2.19@4800,2800
GND: 7805.2 "DC 9V.2" "DC 9V.2A" "DC 9V.2B" "DC 9V.3" "DC 9V.3A" "DC 9V.3B" "VR1  LM1117-3.3.1" BT1.2 C1.1 C2.1 C3.1 C4.1 C5.1 C6.1 C7.1 C8.1 C9.1 C10.1 C11.1 C12.1 C12_1.2 C12_2.2 C12_3.2 C12_4.2 C13.1 C14.1 C15.1 C16.1 C17.2 C18.1 C19.2 C20.1 C21.1 C22.2 C23.1 C24.2 C25.1 C32.1 C34.2 C35.1 C36.1 C37.2 CN1.4 COM1.5 COM1.10 COM1.11 D10.1 JP1.1 JP1.2 JP1.3 JP1.4 JP1.7 JP1_2.2 JP1_2.3 JP1_2.4 JP1_2.7 JP1_3.1 JP1_3.3 JP1_3.4 JP1_3.7 JP1_4.1 JP1_4.2 JP1_4.4 JP1_4.7 P1.26 P1.59 P2.59 P4.4 P4.6 P4.8 P4.10 P4.12 P4.14 P4.16 P4.18 P4.20 P5.22 P5.26 P5.27 P7.1 pad.0 pad.1 pad.2 pad.3 Q2.3 R13.1 R21.1 R23.1 R24.3 R25.1 R32.1 R38.1 R41.3 S17.2 SOTP143.1 U1.16 U1.30 U1.38 U1.51 U1.61 U1.71 U1.83 U1.94 U1.107 U1.120 U1.130 U1.138 U1.143 U4.15 U5.4 | length 41445.7
  Top Layer w8: v1(260,1410) C20.1@425,1410 460,1445 515,1445 C19.2@550,1410 ; R41.3@260,1734 160,1834 P7.1@160,1919 160,1961 R38.1@258,2059 201,2116 201,2198 241,2238 v1(610,2238) ; R13.1@296,769 296,942 356,1002 ; 413.39,328.15 452.76,328.15 630.94,328.15 D10.1@700,259.09 784.09,259.09 C21.1@850,325 C22.2@970,325 1034.76,260.24 7805.2@1270,260.24 v1@2160,260.24 ; v1(550,728) 868,728 891,751 1351,751 1399,799 v1(1515,799) ; v1(550,1320) C19.2@550,1410 ; v1(610,2000) U5.4@683.51,2000 ; v1(610,2445) 1750,2445 1850,2545 2185,2545 2230,2500 P1.26@2260,2500 2305,2500 2346,2459 2930.85,2459 U1.30@3006.23,2383.63 3039.85,2350 v1(3350,2350) ; C25.1@800,1410 765,1375 585,1375 C19.2@550,1410 ; 970,260 970.24,260.24 ; C24.2@1420,1100 C23.1@1420,970 1420,937 1451,906 v1(1515,906) ; R24.3@1565,1580 v1(1810,1580) ; R23.1@1810,1750 R21.1@1960,1750 ; v1(2160,75) v1(3180,75) 3456,75 3516,135 S17.2@3750,135 3780,165 3970,165 S17.2@4000,135 4040,95 4105,95 C1.1@4150,140 ; v1(2450,2075) C12.1@2550,2075 2600,2125 2875.66,2125 U1.38@2936.63,2185.97 3005.66,2255 v1(3349.34,2255) 3405,2255 3470,2320 3710.95,2320 U1.120@3844.18,2453.22 4150.95,2760 4290,2760 C9.1@4335,2805 v1(4527.64,2805) ; v1(2450,2320) R25.1@2535,2320 ; v1(2450,2715) 2415,2680 2415,2620 2435,2600 C4.1@2465,2600 2500,2635 2500,2895 C5.1@2470,2925 ; C6.1@2735,1570 2735,1622.44 U1.51@3117.58,2005.02 3212.56,2100 v1(3350,2100) ; CN1.4@2765,410 C36.1@3090,410 C37.2@3190,410 3190,344 v1(3182,336) ; C15.1@2815,3005 2950,2870 2950,2829.6 U1.16@3201.1,2578.5 3244.6,2535 v1(3350,2535) ; SOTP143.1@2844.53,696.34 2875.87,665 2960,665 C35.1@3000,705 3035,740 3070,740 3110,700 v1(3180,700) ; v1(3055,3105) C3.1@3125,3105 3160,3140 3200,3140 C2.1@3235,3105 ; C13.1@3080,1625 3080,1689.05 U1.61@3256.78,1865.82 3350,1959.05 v1(3350,2000) ; C7.1@3380,1360 3320,1420 3320,1500 3360,1540 3360,1690.66 U1.71@3395.97,1726.63 3455,1785.66 3455,1840 v1(3515,1900) 3601.21,1900 U1.83@3649.3,1851.9 3739,1762.21 3739,1608 C11.1@3852,1495 ; JP1.4@3435,3832.36 JP1.3@3485,3832.36 JP1.2@3535,3832.36 JP1.1@3585,3832.36 3608.64,3856 3691.36,3856 JP1_2.4@3715,3832.36 3715,3779 3729,3765 3754,3765 3765,3776 JP1_2.3@3765,3832.36 3765,3882 3774,3891 3807,3891 3815,3883 JP1_2.2@3815,3832.36 3815,3775 3868,3722 v1(3970,3722) 3985,3737 JP1_3.4@3985,3832.36 3985,3885 3993,3893 4026,3893 4035,3884 4035,3775 4060,3750 4110,3750 4135,3775 JP1_3.1@4135,3832.36 JP1_4.4@4265,3832.36 4265,3765 4280,3750 4340,3750 4365,3775 JP1_4.2@4365,3832.36 JP1_4.1@4415,3832.36 ; C16.1@3510,3170 3565,3115 v1(3565,2975) 3565,2814.34 U1.143@3524.03,2773.37 ; v1(3515,2050) 3757.44,2050 U1.94@3802.42,2005.02 4107.44,1700 4300,1700 C10.1@4345,1745 ; v1(3515,2220) 3949.34,2220 U1.107@3983.37,2185.97 4020.34,2149 4164,2149 C14.1@4200,2185 ; v1@3515,2480 3592.56,2480 U1.130@3704.98,2592.42 3935,2822.44 C8.1@3935,2900 ; v1(3515,2665) 3554.85,2665 U1.138@3593.63,2703.77 ; JP1.7@3535,3627.64 3535,3565 3525,3555 3525,3465 C12_1.2@3580,3410 C12_2.2@3860,3410 ; P5.22@3670,4130 C17.2@3670,4245 ; JP1_2.7@3815,3627.64 3815,3565 3805,3555 3805,3465 C12_2.2@3860,3410 ; P5.26@3860,4110 P5.26@3870,4120 ; P5.26@3870,4130 3910,4170 3910,4220 C18.1@3880,4250 ; JP1_3.7@4085,3627.64 4085,3575 4075,3565 4075,3465 C12_3.2@4130,3410 ; JP1_4.7@4365,3627.64 4365,3705 4415,3755 JP1_4.1@4415,3832.36 ; BT1.2@4467.5,815 4482.5,800 P2.59@4800,800 4830,800 4879,849 5257.97,849 COM1.5@5365.08,741.89 ; v1(4527.64,3527.64) 4494.64,3527.64 4467,3500 4467,3437 4440,3410 C12_4.2@4410,3410 C12_3.2@4130,3410 ; v1(4527.64,3832.36) JP1_4.1@4415,3832.36 ; v1(4527.64,4020.64) v1(5528,4021) ; U4.15@5202.83,1830 5374.5,1830 v1@5400,1855.5 ; C34.2@5240,2245 5290,2295 5350,2295 C32.1@5400,2245 v1(5400,1856) ; v1(5380,3307) 5573,3307 P4.4@5620,3260 ; Q2.3@5380,3515 v1(5528,3515) ; v1(5420.98,1605.02) v1(5620,1605) ; C12_2.2@3860,3410 C12_3.2@4130,3410
  Bottom Layer w8: v1(260,1410) R41.3@260,1734 ; 295.28,485.63 295.28,406.89 374.02,328.15 ; v1(550,728) v1(550,1090) v1(550,1320) ; v1(610,2000) v1(610,2238) v1(610,2445) ; v1(1515,260) v1(1515,799) v1@1515,905 ; v1(1515,906) 1515,1530 R24.3@1565,1580 ; v1(1810,1580) R23.1@1810,1750 ; v1(2160,75) v1(2160,260) P1.59@2160,800 ; v1(2450,2075) v1(2450,2320) v1(2450,2715) ; v1(3055,3105) 3055,2830 v1(3350,2535) v1(3350,2350) v1(3350,2100) v1(3350,2000) ; v1@3180,336 v1(3180,700) ; v1(3515,1900) v1(3515,2050) v1(3515,2220) v1(3515,2325) v1(3515,2485) v1(3515,2665) 3515,2925 v1(3565,2975) ; P5.22@3670,4130 3715,4175 3825,4175 P5.26@3870,4130 P5.27@3970,4030 v1(3970,3722) ; v1(4527.64,2805) v1(4527.64,3527.64) v1(4527.64,3832.36) v1(4527.64,4020.64) ; COM1.5@5365.08,741.89 5314,690.81 5314,575.05 COM1.11@5420.98,468.07 COM1.10@5420.98,1451.93 v1(5420.98,1605.02) 5420.98,1835.02 v1(5400,1856) ; v1(5380,3307) Q2.3@5380,3515 ; v1(5528,3515) v1(5528,4021) ; v1(5620,1605) P4.20@5620,2460 P4.18@5620,2560 P4.16@5620,2660 P4.14@5620,2760 P4.12@5620,2860 P4.10@5620,2960 P4.8@5620,3060 P4.6@5620,3160 P4.4@5620,3260
  other v1: 2593,1541 993,1886 537,2713 2460,3106 2626,3108 2466,3751
IN1: P7.2 R39.1 | length 171.1
  Top Layer w8: P7.2@260,1919 R39.1@381,2040
IN2: R40.1 R41.2 | length 199.1
  Top Layer w8: R41.2@360,1734 382,1756 R40.1@382,1924
JTCK: P2.29 P4.9 P4.11 U1.109 | length 2150.2
  Top Layer w8: U1.109@3997.29,2300.11 4032.18,2335 4765,2335 P2.29@4800,2300 ; v1(4985,2860) P4.11@5520,2860
  Bottom Layer w8: P2.29@4800,2300 4830,2300 4880,2350 4930,2350 4985,2405 v1(4985,2860) ; P4.11@5520,2860 P4.9@5520,2960
JTDI: P2.28 P4.5 U1.110 | length 2303
  Top Layer w8: U1.110@3983.37,2314.03 3986.16,2314.03 4023.13,2351 4851,2351 P2.28@4900,2400 ; v1(4950,3160) P4.5@5520,3160
  Bottom Layer w8: P2.28@4900,2400 4950,2450 v1(4950,3160)
JTDO: P2.9 P4.13 U1.133 | length 2804.2
  Top Layer w8: U1.133@3663.22,2634.18 3735,2705.95 3735,2810 4060,3135 4635,3135 P2.9@4800,3300 4830,3300 4880,3350 v1(5055,3350) ; v1(5055,2760) P4.13@5520,2760
  Bottom Layer w8: v1(5055,2760) v1(5055,3350)
JTMS: P2.30 P4.7 U1.105 | length 2341.9
  Top Layer w8: U1.105@3955.53,2158.13 3988.66,2125 4260,2125 4385,2250 4850,2250 P2.30@4900,2300 ; v1(5020,3060) P4.7@5520,3060
  Bottom Layer w8: P2.30@4900,2300 4902.63,2300 5020,2417.37 v1(5020,3060)